# Altium PCB PCB_Recoil Motor Controller G431 DRV8350RS v1.1.pcbdoc
Units mm, origin at the board's own origin, x right, y up, seen from the top; angles counter-clockwise.
Board outline 121.4 x 97.9 mm, 2 copper layers (Top Layer, Bottom Layer); 94 components, 78 nets, 355 pads, 526 vias.
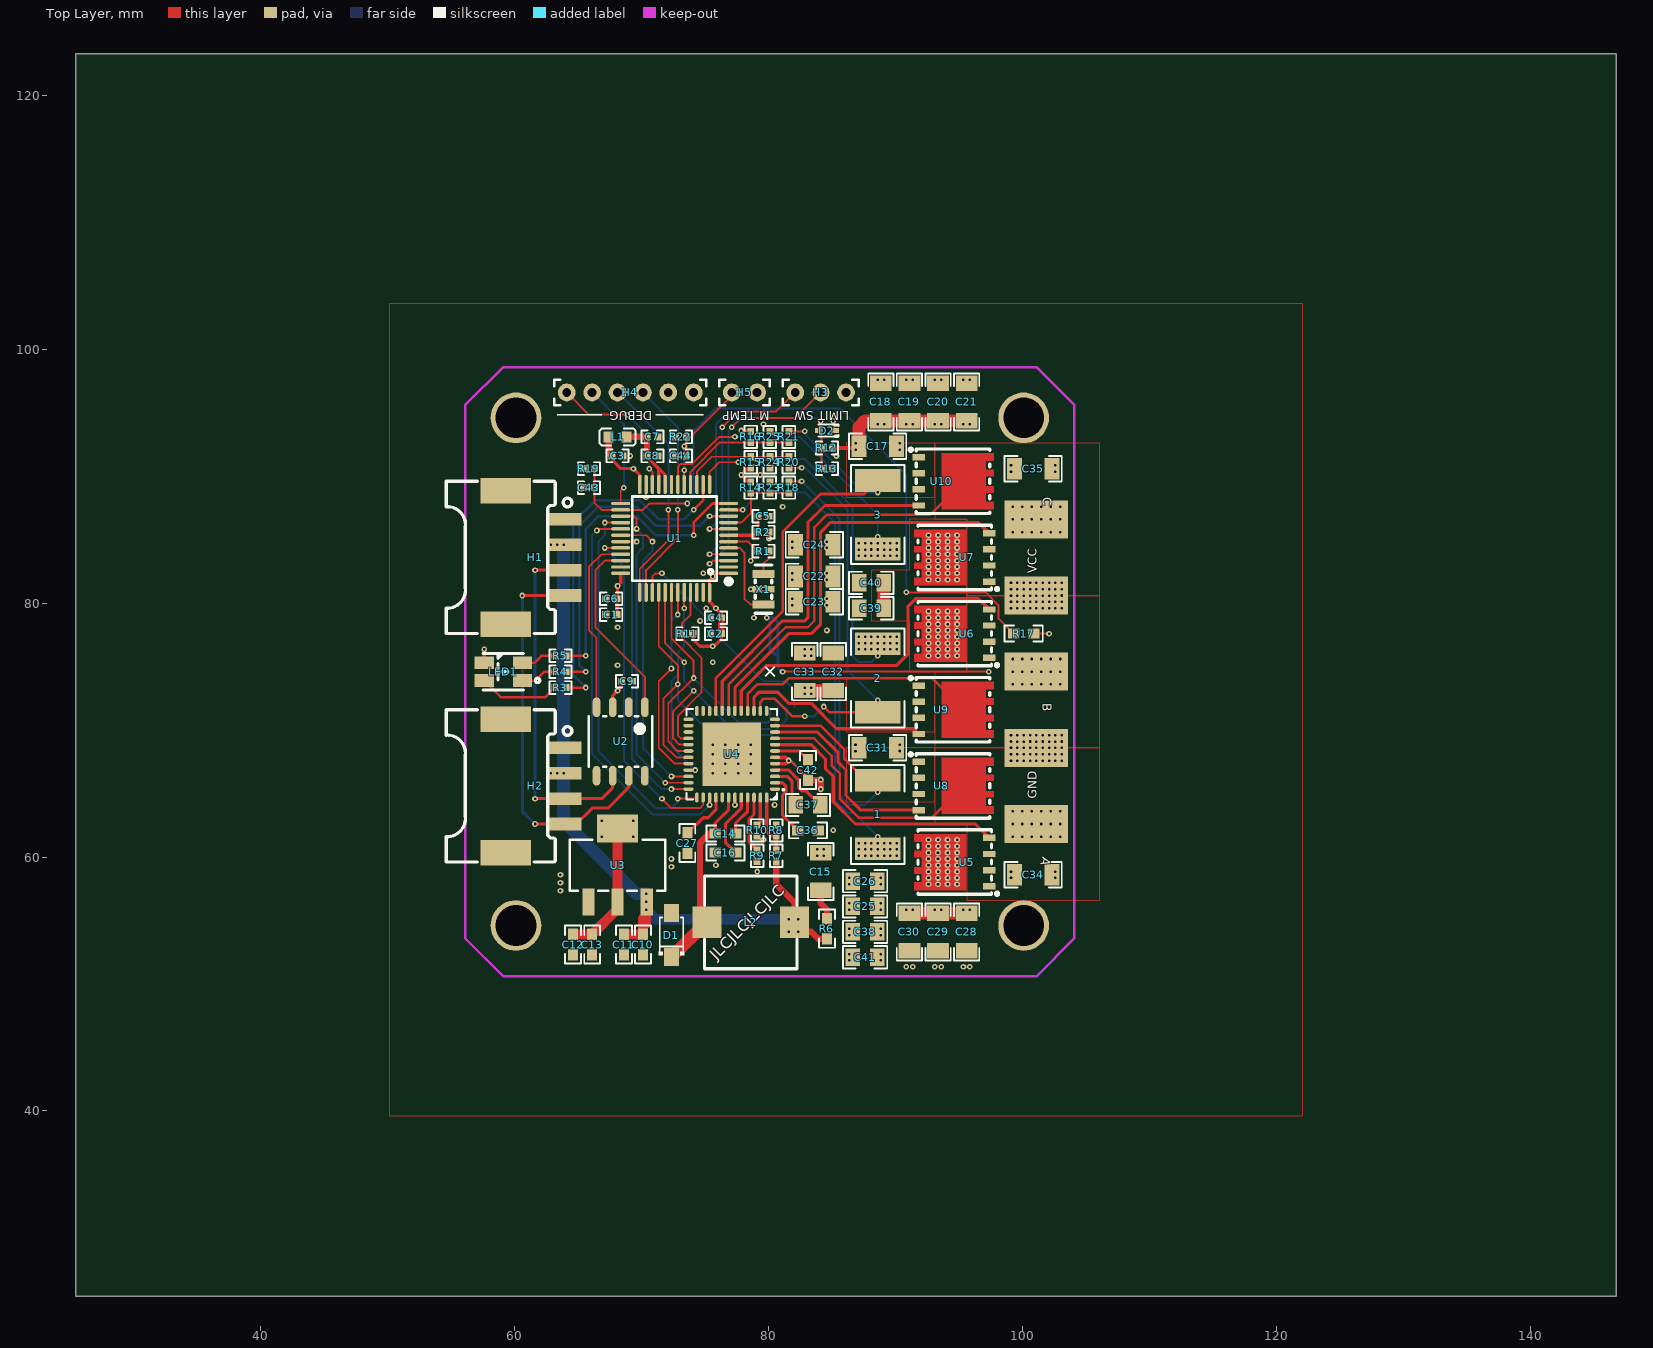
[diagram p0: Top Layer view]
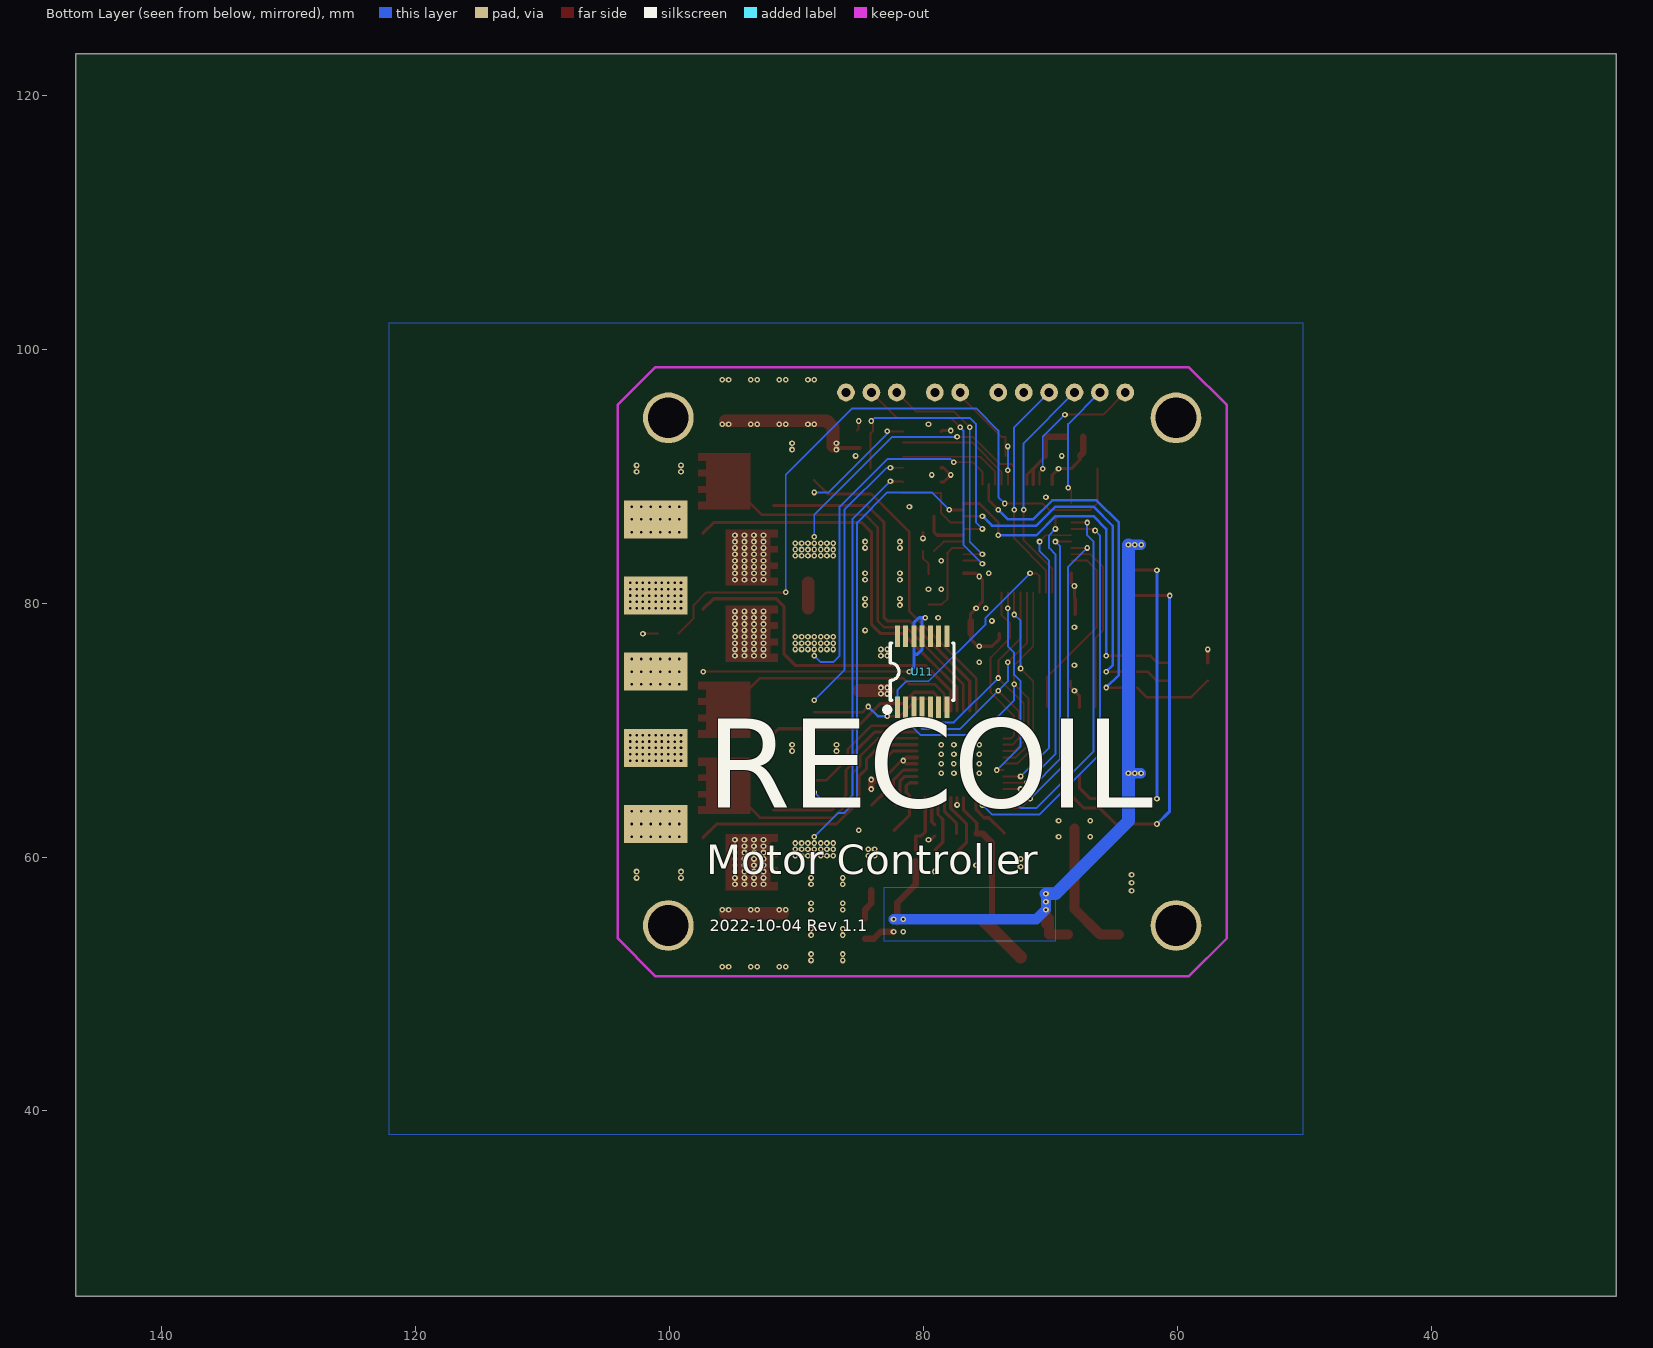
[diagram p1: Bottom Layer view, seen from below]

## Layer stack, top to bottom
Top Layer: signal copper (thickness not stored)
Dielectric: dielectric 0.32, FR-4, Dk 4.8
Bottom Layer: signal copper (thickness not stored)

## Board outline
146.8,25.4 25.4,25.4 25.4,123.3 146.8,123.3

## Components (designator, comment, footprint, x,y, rotation, side; value= is the part's Value field where it differs from the comment)
1 "3mR" RES-2512_NT 88.6,63.35 r270 top
2 "3mR" RES-2512_NT 88.6,74.1 r90 top
3 "3mR" RES-2512_NT 88.6,86.975 r270 top
C1 "1u" CAPA-0402 67.6,79.1 r0 top
C2 "1u" CAPA-0402 75.85,77.6 r0 top
C3 "100n" CAPA-0402 68.1,91.6 r180 top
C4 "100n" CAPA-0402 75.85,78.85 r0 top
C5 "100n" CAPA-0402 79.6,86.85 r180 top
C6 "100n" CAPA-0402 67.6,80.35 r0 top
C7 "1u" CAPA-0402 70.85,93.1 r180 top
C8 "10n" CAPA-0402 70.85,91.6 r180 top
C9 "100n" CAPA-0402 68.85,73.85 r180 top
C10 "1u" CAPA-0603 70.1,53.1 r90 top
C11 "10u" CAPA-0603 68.6,53.1 r90 top
C12 "10u" CAPA-0603 64.6,53.1 r90 top
C13 "1u" CAPA-0603 66.1,53.1 r90 top
C14 "10n" CAPA-0603 76.6,61.85 r180 top
C15 "47u" CAPA-1206 84.1,58.85 r270 top
C16 "470n" CAPA-0603 76.6,60.35 r0 top
C17 "10u" CAPA-1206 88.6,92.35 r180 top
C18 "10u" CAPA-1206 88.85,95.85 r270 top
C19 "10u" CAPA-1206 91.1,95.85 r270 top
C20 "10u" CAPA-1206 93.35,95.85 r270 top
C21 "10u" CAPA-1206 95.6,95.85 r270 top
C22 "10u" CAPA-1206 83.6,82.1 r180 top
C23 "10u" CAPA-1206 83.6,80.1 r180 top
C24 "10u" CAPA-1206 83.6,84.6 r180 top
C25 "100n" CAPA-0805 87.601,56.101 r0 top
C26 "1u" CAPA-0805 87.6,58.1 r0 top
C27 "1u" CAPA-0603 73.6,61.1 r270 top
C28 "10u" CAPA-1206 95.6,54.1 r90 top
C29 "10u" CAPA-1206 93.35,54.1 r90 top
C30 "10u" CAPA-1206 91.1,54.1 r90 top
C31 "10u" CAPA-1206 88.6,68.6 r0 top
C32 "10u" CAPA-1206 85.1,74.6 r270 top
C33 "10u" CAPA-1206 82.85,74.6 r270 top
C34 "10u" CAPA-1206 100.85,58.6 r180 top
C35 "10u" CAPA-1206 100.85,90.6 r180 top
C36 "1u" CAPA-0603 83.1,62.1 r180 top
C37 "47n" CAPA-0805 83.1,64.1 r180 top
C38 "1u" CAPA-0805 87.601,54.1 r0 top
C39 "1u" CAPA-0805 88.101,79.599 r0 top
C40 "1u" CAPA-0805 88.101,81.6 r0 top
C41 "100n" CAPA-0805 87.601,52.101 r0 top
C42 "1u" CAPA-0603 83.1,66.85 r270 top
C43 "1u" CAPA-0402 65.85,89.1 r0 top
C44 "1u" CAPA-0402 73.1,91.6 r0 top
D1 "DFLS1100" SOD-123FL_L2.7-W1.8-LS3.8-RD 72.35,53.85 r90 top
D2 "BAT30KFILM" SOD-523_L1.2-W0.8-LS1.6-RD-1 84.6,93.6 r180 top
H1 "HDR-SMT2.0-H-P4-R1-C4" CONN-SMD_SM04B-PASS-TBT-LF-SN 61.6,83.6 r90 top
H2 "HDR-SMT2.0-H-P4-R1-C4" CONN-SMD_SM04B-PASS-TBT-LF-SN 61.6,65.6 r90 top
H3 "HDR-TH2.0-V-P3-R1-C3" HDR-TH2.0-V-P3-R1-C3 84.1,96.6 r180 top
H4 "HDR-TH2.0-V-P6-R1-C6" HDR-TH2.0-V-P6-R1-C6 69.1,96.6 r180 top
H5 "HDR-TH2.0-V-P2-R1-C2" HDR-TH2.0-V-P2-R1-C2 78.1,96.6 r180 top
L1 "600Ω" L0603 68.1,93.1 r180 top
L2 "220uH" IND-SMD_L7.3-W7.3_GCRH73 78.6,54.85 r180 top
LED1 "TJ-S3528UG2W9TLCCYRGB-A5" LED-ARRAY-SMD_4P-L3.2-W2.7-TL-RD_TJ-S3528 59.1,74.6 r180 top
R1 "2k2" RES-0402 79.6,84.1 r180 top
R2 "100k" RES-0402 79.6,85.6 r0 top
R3 "1k" RES-0402 63.6,73.35 r180 top
R4 "1k" RES-0402 63.6,74.6 r180 top
R5 "1k" RES-0402 63.6,75.85 r180 top
R6 "1R5" RES-0603 84.6,54.35 r270 top
R7 "2k" RES-0402 80.6,60.1 r270 top
R8 "2k" RES-0402 80.6,62.1 r270 top
R9 "332k" RES-0402 79.1,60.1 r90 top
R10 "200k" RES-0402 79.1,62.1 r90 top
R11 "10k" RES-0402 73.6,77.6 r0 top
R12 "220k" RES-0402 84.6,92.225 r0 top
R13 "10k" RES-0402 84.6,90.6 r180 top
R14 "1k5" RES-0402 78.6,89.1 r90 top
R15 "1k5" RES-0402 78.6,91.1 r270 top
R16 "1k5" RES-0402 78.6,93.1 r90 top
R17 "10k" RES-0603 100.1,77.6 r180 top
R18 "1k5" RES-0402 81.601,89.101 r90 top
R19 "2k" RES-0402 65.851,90.599 r0 top
R20 "1k5" RES-0402 81.601,91.1 r270 top
R21 "1k5" RES-0402 81.601,93.099 r90 top
R22 "2k" RES-0402 73.1,93.099 r0 top
R23 "2k2" RES-0402 80.1,89.101 r270 top
R24 "2k2" RES-0402 80.1,91.1 r90 top
R25 "2k2" RES-0402 80.1,93.099 r270 top
U1 "STM32G431CBTx" LQFP-48_L7.0-W7.0-P0.50-LS9.0-BL 72.6,85.1 r90 top
U2 "SN65HVD230D" SOIC-8_L5.0-W4.0-P1.27-LS6.0-TL 68.35,69.1 r270 top
U3 "AMS1117-3.3" SOT-223_L6.5_W3.5_P2.30_BL 68.1,59.35 r0 top
U4 "DRV8350RSRGZT" VQFN-48_L7.0-W7.0-P0.50-TL-EP5.0 77.1,68.1 r180 top
U5 "STL100N10F7" POWERVDFN-8_L6.2-W5.2-P1.27-LS6.0-BL 95.6,59.6 r90 top
U6 "STL100N10F7" POWERVDFN-8_L6.2-W5.2-P1.27-LS6.0-BL 95.6,77.6 r90 top
U7 "STL100N10F7" POWERVDFN-8_L6.2-W5.2-P1.27-LS6.0-BL 95.6,83.6 r90 top
U8 "STL100N10F7" POWERVDFN-8_L6.2-W5.2-P1.27-LS6.0-BL 93.6,65.6 r270 top
U9 "STL100N10F7" POWERVDFN-8_L6.2-W5.2-P1.27-LS6.0-BL 93.6,71.6 r270 top
U10 "STL100N10F7" POWERVDFN-8_L6.2-W5.2-P1.27-LS6.0-BL 93.6,89.6 r270 top
U11 "AS5047P-ATSM" TSSOP-14_L5.0-W4.4-P0.65-LS6.4-BL 80.1,74.6 r0 bottom
X1 "8M" OSC-SMD_3P-L3.2-W1.3-P1.2-L 79.6,81.1 r90 top

## Footprints (in the part's own frame and the unit in brackets; to place one, negate y for a bottom-side part, rotate by r counter-clockwise, add the part's x,y. Pads: shape width x height; smd on the part's side, far side on the other; paste and mask are expansions set on the pad)
CAPA-0402 [mm]
  rect 0.566x0.54 smd: 1(-0.433,0) 2(0.433,0)
  silkscreen extent -0.87,-0.5 0.87,0.5
CAPA-0603 [mm]
  rect 0.9x0.8 smd: 1(-0.8,0) 2(0.8,0)
  silkscreen extent -1.5,-0.62 1.5,0.62
CAPA-0805 [mm]
  rect 1.133x1.377 smd: 1(-0.966,0) 2(0.966,0)
  silkscreen extent -1.75,-0.88 1.75,0.88
CAPA-1206 [mm]
  rect 1.208x1.701 smd: 1(-1.479,0) 2(1.479,0)
  silkscreen extent -2.25,-1 2.25,1
CONN-SMD_SM04B-PASS-TBT-LF-SN [mm]
  rect 1x2.7 smd: 1(3,-2.3) 2(1,-2.3) 3(-1,-2.3) 4(-3,-2.3)
  rect 2x4 smd: 5(-5.25,2.3) 6(5.25,2.3)
  silkscreen extent -6,-2.91 6,7
HDR-TH2.0-V-P2-R1-C2 [mm]
  round 1.4 hole 0.7: 1(-1,0) 2(1,0)
  silkscreen extent -2,-1 2,1
HDR-TH2.0-V-P3-R1-C3 [mm]
  round 1.4 hole 0.7: 1(-2,0) 2(0,0) 3(2,0)
  silkscreen extent -3,-1 3,1
HDR-TH2.0-V-P6-R1-C6 [mm]
  round 1.4 hole 0.7: 1(-5,0) 2(-3,0) 3(-1,0) 4(1,0) 5(3,0) 6(5,0)
  silkscreen extent -6,-1 6,1
IND-SMD_L7.3-W7.3_GCRH73 [mm]
  rect 2.3x2.5 smd: 1(-3.45,0) 2(3.45,0)
  silkscreen extent -3.65,-3.65 3.65,3.65
L0603 [mm]
  rect 0.8x0.864 smd: 1(-0.7,0) 2(0.7,0)
  silkscreen extent -1.42,-0.65 1.41,0.67
LED-ARRAY-SMD_4P-L3.2-W2.7-TL-RD_TJ-S3528 [mm]
  rect 1.5x1 smd: 1(-1.5,0.7) 2(-1.5,-0.7) 3(1.5,0.7) 4(1.5,-0.7)
  silkscreen extent -2.87,-1.44 1.61,1.44
LQFP-48_L7.0-W7.0-P0.50-LS9.0-BL [mm]
  oval 0.27x1.5 smd: 1(-2.75,-4.25) 2(-2.25,-4.25) 3(-1.75,-4.25) 4(-1.25,-4.25) 5(-0.75,-4.25) 6(-0.25,-4.25) 7(0.25,-4.25) 8(0.75,-4.25) 9(1.25,-4.25) 10(1.75,-4.25) 11(2.25,-4.25) 12(2.75,-4.25) 25(2.75,4.25) 26(2.25,4.25) 27(1.75,4.25) 28(1.25,4.25) 29(0.75,4.25) 30(0.25,4.25) 31(-0.25,4.25) 32(-0.75,4.25) 33(-1.25,4.25) 34(-1.75,4.25) 35(-2.25,4.25) 36(-2.75,4.25)
  oval 1.5x0.27 smd: 13(4.25,-2.75) 14(4.25,-2.25) 15(4.25,-1.75) 16(4.25,-1.25) 17(4.25,-0.75) 18(4.25,-0.25) 19(4.25,0.25) 20(4.25,0.75) 21(4.25,1.25) 22(4.25,1.75) 23(4.25,2.25) 24(4.25,2.75) 37(-4.25,2.75) 38(-4.25,2.25) 39(-4.25,1.75) 40(-4.25,1.25) 41(-4.25,0.75) 42(-4.25,0.25) 43(-4.25,-0.25) 44(-4.25,-0.75) 45(-4.25,-1.25) 46(-4.25,-1.75) 47(-4.25,-2.25) 48(-4.25,-2.75)
  silkscreen extent -3.59,-4.46 3.3,3.34
OSC-SMD_3P-L3.2-W1.3-P1.2-L [mm]
  rect 0.65x1.7 smd: 1(-1.2,0) 3(1.2,0)
  rect 0.5x1.7 smd: 2(0,0)
  silkscreen extent -1.9,-0.65 1.9,0.65
POWERVDFN-8_L6.2-W5.2-P1.27-LS6.0-BL [mm]
  rect 0.5x1 smd: 1(-1.905,-1.775) 2(-0.635,-1.775) 3(0.635,-1.775) 4(1.905,-1.775)
  round 0 smd: 5(0,1.775)
  Top Layer region: -2.2,0.025 -2.2,4.125 -1.6,4.125 -1.6,3.525 -0.9,3.525 -0.9,4.125 -0.4,4.125 -0.4,3.525 0.4,3.525 0.4,4.125 0.9,4.125 0.9,3.525 1.6,3.525 1.6,4.125 2.2,4.125 2.2,0.025
  silkscreen extent -2.61,-2.53 2.54,3.83
RES-0402 [mm]
  rect 0.566x0.54 smd: 1(-0.433,0) 2(0.433,0)
  silkscreen extent -0.87,-0.5 0.87,0.5
RES-0603 [mm]
  rect 0.9x0.8 smd: 1(-0.8,0) 2(0.8,0)
  silkscreen extent -1.5,-0.62 1.5,0.62
RES-2512_NT [mm]
  rect 1.8x3.6 smd: 1(-2.7,0) 2(2.7,0)
  rect 0.25x0.25 smd: 3(-1.8,0) 4(1.8,0)
  silkscreen extent -3.9,-2.1 3.9,2.1
SOD-123FL_L2.7-W1.8-LS3.8-RD [mm]
  rect 1.4x1.2 smd: 1(-1.735,0) 2(1.735,0)
  silkscreen extent -1.6,-1 1.38,1
SOD-523_L1.2-W0.8-LS1.6-RD-1 [mm]
  rect 0.6x0.36 smd: 1(-0.635,0) 2(0.635,0)
  silkscreen extent -0.91,-0.55 0.68,0.55
SOIC-8_L5.0-W4.0-P1.27-LS6.0-TL [mm]
  oval 1.55x0.6 smd: 1(-2.7,1.905) 2(-2.7,0.635) 3(-2.7,-0.635) 4(-2.7,-1.905) 5(2.7,-1.905) 6(2.7,-0.635) 7(2.7,0.635) 8(2.7,1.905)
  silkscreen extent -2,-2.5 2,2.5
SOT-223_L6.5_W3.5_P2.30_BL [mm]
  rect 0.95x2.15 smd: 1(-2.3,-2.9) 2(0,-2.9) 3(2.3,-2.9)
  rect 3.25x2.2 smd: 2(0,2.9)
  silkscreen extent -3.75,-2 3.75,2
TSSOP-14_L5.0-W4.4-P0.65-LS6.4-BL [mm]
  rect 0.4x1.7 smd: 1(1.95,2.8) 2(1.3,2.8) 3(0.65,2.8) 4(0,2.8) 5(-0.65,2.8) 6(-1.3,2.8) 7(-1.95,2.8) 8(-1.95,-2.8) 9(-1.3,-2.8) 10(-0.65,-2.8) 11(0,-2.8) 12(0.65,-2.8) 13(1.3,-2.8) 14(1.95,-2.8)
  silkscreen extent -2.5,-2.25 2.95,3.2
VQFN-48_L7.0-W7.0-P0.50-TL-EP5.0 [mm]
  oval 0.785x0.28 smd: 1(-3.407,2.75) 2(-3.407,2.25) 3(-3.407,1.75) 4(-3.407,1.25) 5(-3.407,0.75) 6(-3.407,0.25) 7(-3.407,-0.25) 8(-3.407,-0.75) 9(-3.407,-1.25) 10(-3.407,-1.75) 11(-3.407,-2.25) 12(-3.407,-2.75) 25(3.407,-2.75) 26(3.407,-2.25) 27(3.407,-1.75) 28(3.407,-1.25) 29(3.407,-0.75) 30(3.407,-0.25) 31(3.407,0.25) 32(3.407,0.75) 33(3.407,1.25) 34(3.407,1.75) 35(3.407,2.25) 36(3.407,2.75)
  oval 0.28x0.785 smd: 13(-2.75,-3.407) 14(-2.25,-3.407) 15(-1.75,-3.407) 16(-1.25,-3.407) 17(-0.75,-3.407) 18(-0.25,-3.407) 19(0.25,-3.407) 20(0.75,-3.407) 21(1.25,-3.407) 22(1.75,-3.407) 23(2.25,-3.407) 24(2.75,-3.407) 37(2.75,3.407) 38(2.25,3.407) 39(1.75,3.407) 40(1.25,3.407) 41(0.75,3.407) 42(0.25,3.407) 43(-0.25,3.407) 44(-0.75,3.407) 45(-1.25,3.407) 46(-1.75,3.407) 47(-2.25,3.407) 48(-2.75,3.407)
  rect 4.6x5 smd: 49(0,0)
  silkscreen extent -4.14,-3.58 3.58,3.58

## Free pads (board coordinates)
  round 4 hole 3.2: 1(60.1,54.6) 1(60.1,94.6) 1(100.1,94.6) 1(100.1,54.6)
  rect 5x3 smd far side: 1(101.1,68.599) 1(101.1,62.598) 2(101.099,74.599) 2(101.099,80.599) 3(101.1,86.599)
  rect 5x3 smd: 1(101.1,68.599) 1(101.1,62.598) 2(101.099,74.599) 2(101.099,80.599) 3(101.1,86.599)

## Via types
v1: diameter 0.45, hole 0.2, Top Layer to Bottom Layer, tented both sides, 526 vias

## Nets (pads, with @x,y where several pads share a name; then routed paths per layer and width w, separated by ;. In a path a pad name is that pad's centre, name@x,y a point inside that pad or via, vN(x,y) a via of type N, cw(c..) or ccw(c..) an arc to the next point about the centre after c; other vN are vias at no path point)
3V3: C1.2 C2.2 C3.2 C4.2 C6.2 C9.2 C12.2 C13.2 D2.1 H4.2 H5.1 L1.2 LED1.4 R2.2 R11.2 R14.2 R15.2 R16.2 R17.1 U1.1 U1.24 U1.36 U1.48 U2.3 U3.2 U11.11 U11.12 | length 70.3
  Top Layer w0.15: v1(81.1,74.6) v1(97.35,74.6) ; v1(85.1,94.35) 85.1,93.735 D2.1 ; R17.1 v1(102.1,77.6)
  Top Layer w0.25: LED1.4 v1(57.6,76.35) ; C3.2@67.667,91.6 67.667,91.283 68.35,90.599 v1(69.35,90.6) ; U2.3 67.715,72.715 v1(68.1,73.1) 68.416,73.416 C9.2@68.416,73.851 ; C1.2 C6.2 68.101,80.417 68.101,81.349 v1(68.1,81.35) 68.35,81.6 U1.36@68.35,82.35 ; v1(69.35,90.6) 69.851,90.099 U1.24 ; R11.2@74.032,77.6 74.032,77.168 74.6,76.6 v1(75.6,76.6) 75.714,76.6 76.282,77.168 C2.2@76.282,77.6 ; U1.48 75.35,81.85 v1(75.6,82.1) 75.85,82.35 U1.1 ; U1.48 75.35,80.1 v1(75.85,79.6) 76.282,79.168 C4.2@76.282,78.601 ; v1(77.85,93.6) 78.533,93.6 R16.2 ; R14.2 78.417,89.533 v1(77.85,90.1) 78.417,90.667 R15.2 ; v1(80.033,85.1) R2.2
  Top Layer w0.5: L1.2 67.4,91.867 C3.2 ; C2.2 76.283,77.917 C4.2@76.283,78.6
  Top Layer w0.8: C12.2@64.6,53.902 66.1,53.902 68.101,55.903 U3.2@68.101,56.449 ; U3.2@68.1,56.45 U3.2@68.1,62.25
  Mid-Layer 1 w0.15: v1(97.35,74.6) 100.35,77.6 v1(102.1,77.6)
  Bottom Layer w0.25: U11.12 80.75,74.95 v1(81.1,74.6) ; v1(79.85,78.85) 80.1,78.849 U11.11 80.1,76.35 80.476,75.974 80.75,75.974 U11.12 80.75,78.451 80.349,78.849 v1(79.85,78.85)
  other v1: 66.85,61.6 69.35,61.601 66.85,62.85 69.35,62.85
5V: C10.2 C11.2 H1.2 H2.2 L2.1 R6.2 R7.2 U3.3 | length 60.1
  Top Layer w0.5: R7.2 80.6,57.851 82.05,56.401 L2.1@82.05,54.85 ; v1(82.35,54.1) 83.351,54.1 83.9,53.551 R6.2
  Top Layer w0.8: C11.2@68.6,53.902 70.1,53.902 70.1,55.151 70.101,54.527 70.35,54.776 v1(70.35,57.1)
  Bottom Layer w0.8: v1@62.848,84.6 v1@63.849,84.6 ; v1(62.85,66.601) v1@63.849,66.602 ; v1(70.35,57.1) v1(70.35,55.85) 71.1,55.1 v1(82.35,55.1)
  Bottom Layer w1: v1@63.849,66.602 63.849,62.85 69.6,57.099 v1@70.349,57.099 ; v1(63.85,66.601) v1(63.849,84.599)
  other v1: 81.6,54.1 81.6,55.1 70.35,56.475 63.35,66.601 62.85,84.6 63.349,84.6
C14_1: C14.1 U4.45 | length 3.2
  Top Layer w0.25: C14.1@77.397,61.849 77.397,62.647 78.35,63.599 U4.45@78.35,64.691
C14_2: C14.2 D1.1 L2.2 U4.42 | length 15.2
  Top Layer w0.25: C14.2@75.797,61.849 75.797,62.675 76.851,63.726 U4.42@76.851,64.691
  Top Layer w0.5: L2.2@75.15,54.85 74.6,55.4 74.6,61.1 75.35,61.85 C14.2
  Top Layer w1: D1.1 75.085,54.85 L2.2@75.15,54.85
C15_2: C15.2 R6.1 | length 2.4
  Top Layer w0.5: C15.2 84.1,56.35 84.601,55.85 R6.1
C16_2: C16.2 U4.44 | length 5.2
  Top Layer w0.25: C16.2@77.401,60.35 76.6,61.151 76.6,61.6 76.6,62.601 77.849,63.851 U4.44@77.849,64.691
C27_1: C27.1 U4.40 | length 4
  Top Layer w0.25: C27.1 73.648,61.9 74.85,63.099 75.226,63.099 75.85,63.726 U4.40@75.85,64.691
C36_2: C36.2 U4.2 | length 5
  Top Layer w0.25: U4.2 81.1,65.85 81.35,65.6 81.35,65.1 81.1,64.85 81.1,63.299 C36.2@82.298,62.1
C37_1: C37.1 U4.4 | length 5.1
  Top Layer w0.25: U4.4@80.506,66.85 81.601,66.85 82.35,66.101 82.35,65.474 82.599,65.225 82.942,65.225 C37.1@84.065,64.1
C37_2: C37.2 U4.3 | length 3.5
  Top Layer w0.25: U4.3@80.506,66.35 81.474,66.35 81.85,65.974 81.85,64.384 C37.2
C42_1: C42.1 U4.7 | length 2.9
  Top Layer w0.25: U4.7 82.399,68.35 C42.1@83.1,67.649
CAN_RX: U1.33 U2.4 | length 14.2
  Top Layer w0.15: U2.4 66.445,77.254 65.851,77.849 65.851,82.85 66.851,83.851 U1.33
CAN_TX: U1.34 U2.1 | length 14.7
  Top Layer w0.15: U1.34 67.1,83.35 66.351,82.601 66.351,78.1 70.255,74.194 U2.1
CANH: H1.4 H2.4 U2.7 | length 31.2
  Top Layer w0.25: v1(60.6,80.6) H1.4 ; v1(61.6,62.6) H2.4@63.9,62.6 ; H2.4 64.85,62.601 66.099,63.851 67.352,63.851 68.985,65.484 U2.7
  Bottom Layer w0.25: v1(60.6,80.6) 60.6,63.6 v1(61.6,62.6)
CANL: H1.3 H2.3 U2.6 | length 27.7
  Top Layer w0.25: v1(61.6,64.6) 63.9,64.6 66.85,64.6 67.715,65.465 U2.6@67.715,66.4 ; v1(61.6,82.6) H1.3@63.9,82.6
  Bottom Layer w0.25: v1(61.6,64.6) v1(61.6,82.6)
ENABLE: U1.44 U4.33 | length 15.7
  Top Layer w0.15: v1(73.35,79.6) U1.44 ; U4.33 v1(74.225,66.85)
  Bottom Layer w0.15: v1(73.35,79.6) 73.351,76.599 72.851,76.101 72.851,74.351 72.35,73.85 72.35,68.725 v1(74.225,66.85)
FETTEMP_SENSE: C43.2 R17.2 R19.2 U1.26 | length 55.7
  Top Layer w0.15: R19.2 C43.2 66.283,87.917 66.85,87.35 U1.26@68.35,87.35 ; U1.26 70.1,87.351 70.599,87.85 v1(73.6,87.85) ; v1(90.85,80.85) 97.1,80.85 98.1,79.85 98.1,78.8 R17.2
  Bottom Layer w0.15: v1(73.6,87.85) 74.1,88.35 74.1,93.599 75.85,95.349 85.599,95.349 90.849,90.099 v1@90.849,80.851
GHA: U4.8 U5.4 | length 21.5
  Top Layer w0.25: U4.8@80.506,68.849 83.351,68.849 84.474,67.724 84.474,66.975 85.101,66.35 85.101,64.351 86.849,62.601 96.28,62.601 U5.4@97.374,61.506
GHB: U4.17 U6.4 | length 26.7
  Top Layer w0.25: U4.17@77.849,71.506 77.849,73.099 79.851,75.1 90.1,75.1 90.974,75.974 90.974,79.726 91.601,80.351 96.531,80.351 U6.4@97.374,79.505
GHC: U4.18 U7.4 | length 31.9
  Top Layer w0.25: U4.18@77.349,71.506 77.349,73.35 81.601,77.6 83.351,77.6 84.1,78.349 84.1,85.601 84.85,86.35 96.531,86.35 U7.4@97.374,85.504
GLA: U4.10 U8.4 | length 15.5
  Top Layer w0.25: U4.10@80.506,69.85 83.849,69.85 85.475,68.225 85.475,67.475 86.099,66.85 86.099,64.849 87.255,63.696 U8.4@91.825,63.696
GLB: U4.15 U9.4 | length 15.6
  Top Layer w0.25: U4.15@78.85,71.506 78.85,72.601 79.226,72.974 80.725,72.974 81.601,72.101 83.351,72.101 85.35,70.099 91.421,70.099 U9.4@91.825,69.695
GLC: U4.20 U10.4 | length 27.9
  Top Layer w0.25: U4.20@76.351,71.506 76.351,73.851 81.101,78.601 82.851,78.601 83.1,78.849 83.1,86.35 84.446,87.694 U10.4@91.825,87.694
GND: 1.2 2.2 3.2 C1.1 C2.1 C3.1 C4.1 C5.1 C6.1 C7.1 C8.1 C9.1 C10.1 C11.1 C12.1 C13.1 C15.1 C16.1 C17.1 C18.1 C19.1 C20.1 C21.1 C22.1 C23.1 C24.1 C25.1 C26.1 C27.2 C28.1 C29.1 C30.1 C31.1 C32.1 C33.1 C34.1 C35.1 C36.1 C38.1 C39.1 C40.1 C41.1 C43.1 C44.1 D1.2 H1.1 H1.5 H1.6 H2.1 H2.5 H2.6 H3.1 H4.1 pad.1@60.1,54.6 pad.1@60.1,94.6 pad.1@100.1,54.6 pad.1@100.1,94.6 pad.1@101.1,68.599 R8.1 R9.1 R13.1 R19.1 R22.1 R23.1 R24.1 R25.1 U1.19 U1.23 U1.35 U1.47 U2.2 U2.8 U3.1 U4.1 U4.27 U4.41 U4.49 U11.5 U11.13 X1.2
  other v1: 90.85,51.35 91.35,51.35 93.1,51.35 93.6,51.35 95.35,51.35 95.85,51.35 86.35,51.85 86.35,52.35 86.35,53.85 86.35,54.35 86.35,55.85 86.35,56.35 63.6,57.35 86.35,57.85 63.6,57.975 86.35,58.35 102.599,58.35 63.6,58.6 79.099,58.85 102.599,58.849 72.349,59.225 75.849,59.35 72.349,59.85 83.85,60.1 84.35,60.1 87.1,60.1 87.6,60.1 88.099,60.101 88.6,60.101 89.1,60.1 89.6,60.1 90.099,60.101 83.85,60.6 84.35,60.6 87.1,60.6 87.6,60.6 88.099,60.601 88.599,60.601 89.1,60.6 89.6,60.6 90.099,60.601 87.1,61.1 87.6,61.1 88.099,61.101 88.599,61.101 89.1,61.1 89.6,61.1 90.099,61.101 85.1,62.1 80.475,64.101 75.6,66.6 76.599,66.6 77.599,66.6 78.6,66.6 75.6,67.35 76.6,67.35 77.6,67.35 78.6,67.351 99.1,67.601 99.6,67.598 100.1,67.598 100.6,67.6 101.1,67.598 101.6,67.6 102.1,67.598 102.6,67.598 103.1,67.6 75.6,68.1 76.599,68.1 77.599,68.1 78.6,68.1 99.1,68.1 99.6,68.098 100.1,68.098 100.6,68.1 101.1,68.098 101.6,68.1 102.1,68.098 102.6,68.098 103.1,68.1 86.85,68.349 99.1,68.601 99.6,68.598 100.1,68.598 100.6,68.6 101.1,68.598 101.6,68.6 102.1,68.598 102.6,68.598 103.1,68.601 75.6,68.85 76.599,68.85 77.599,68.85 78.6,68.85 86.85,68.849 99.1,69.1 99.6,69.098 100.1,69.098 100.6,69.1 101.1,69.098 101.6,69.1 102.1,69.098 102.6,69.098 103.1,69.1 99.1,69.601 99.6,69.598 100.1,69.598 100.6,69.6 101.1,69.598 101.6,69.6 102.1,69.598 102.6,69.598 103.1,69.6 68.1,75.1 75.6,75.35 82.85,75.85 83.35,75.85 82.85,76.35 83.35,76.35 87.1,76.351 87.6,76.351 88.099,76.352 88.599,76.352 89.1,76.351 89.6,76.351 90.099,76.352 87.1,76.851 87.6,76.851 88.099,76.852 88.599,76.852 89.1,76.851 89.6,76.851 90.099,76.852 87.1,77.351 87.6,77.351 88.099,77.352 88.599,77.352 89.1,77.351 89.6,77.351 90.099,77.352 84.6,77.85 68.1,78.1 74.6,78.6 78.85,78.85 75.1,79.6 84.599,79.85 84.599,80.35 78.6,81.1 79.6,81.1 84.599,81.85 74.85,82.35 84.599,82.35 78.6,83.35 87.1,83.725 87.6,83.725 88.099,83.726 88.6,83.726 89.1,83.725 89.6,83.725 90.099,83.726 87.1,84.225 87.6,84.225 88.099,84.226 88.599,84.226 89.1,84.225 89.6,84.225 90.099,84.226 84.599,84.35 87.1,84.725 87.6,84.725 88.099,84.726 88.599,84.726 89.1,84.725 89.6,84.725 90.099,84.726 84.599,84.85 81.1,87.6 70.35,88.35 79.35,90.1 102.599,90.35 102.599,90.849 69.1,91.6 85.35,91.6 90.35,92.101 90.35,92.601 79.6,94.1 88.601,97.6 89.1,97.6 90.85,97.6 91.35,97.6 93.101,97.6 93.601,97.6 95.351,97.6 95.85,97.6
L1_1: C7.2 C8.2 L1.1 U1.20 U1.21 | length 8.6
  Top Layer w0.25: U1.21@71.35,89.35 71.35,90.599 C8.2@70.417,91.532 ; U1.20 71.85,90.099 C8.2@70.417,91.532 ; C8.2@70.417,91.532 C8.2 C8.2@70.417,91.532
  Top Layer w0.5: L1.1 70.417,93.1 C8.2
LED1_1: LED1.1 R4.2 | length 2.9
  Top Layer w0.2: LED1.1 61.649,73.899 62.35,74.6 R4.2
LED1_2: LED1.2 R5.2 | length 2.8
  Top Layer w0.2: LED1.2 61.55,75.301 62.099,75.85 R5.2
LED1_3: LED1.3 R3.2 | length 6.4
  Top Layer w0.2: LED1.3 58.9,72.6 62.417,72.6 R3.2
LED_B: R5.1 U1.12 | length 25.5
  Top Layer w0.2: R5.1 v1(65.6,75.85) ; v1(74.1,85.35) 74.1,86.35 75.599,87.851 U1.12
  Bottom Layer w0.2: v1@65.599,75.85 65.599,85.85 66.6,86.85 69.6,86.85 71.101,85.349 v1(74.1,85.35)
LED_G: R4.1 U1.10 | length 26.6
  Top Layer w0.2: R4.1 v1(65.6,74.6) ; v1(75.35,86.85) U1.10
  Bottom Layer w0.2: v1@65.599,74.6 65.101,75.1 65.101,86.099 66.6,87.6 69.6,87.6 71.098,86.101 74.601,86.101 v1(75.35,86.85)
LED_R: R3.1 U1.14 | length 28.4
  Top Layer w0.2: R3.1 v1(65.6,73.35) ; v1(74.1,87.35) 74.85,88.1 U1.14@74.85,89.35
  Bottom Layer w0.2: v1(65.6,73.35) 64.6,74.35 64.6,86.35 66.35,88.1 69.85,88.1 71.35,86.6 73.35,86.6 v1(74.1,87.35)
LIMITSW_H: H3.3 U1.4 | length 18.8
  Top Layer w0.15: v1(75.35,83.85) U1.4 ; v1(76.35,93.85) 77.601,95.1 80.6,95.1 H3.3@82.099,96.599
  Bottom Layer w0.15: v1(75.35,83.85) 76.35,84.85 v1(76.35,93.85)
LIMITSW_L: H3.2 U1.3 | length 21.2
  Top Layer w0.15: v1@75.35,83.1 75.6,83.35 U1.3 ; v1(77.1,93.85) 77.849,94.6 82.099,94.6 H3.2
  Bottom Layer w0.15: v1@75.35,83.1 76.85,84.6 76.85,93.6 v1(77.1,93.85)
  other v1: 75.35,83.1
MISO: U1.41 U4.29 U11.3 | length 23.7
  Top Layer w0.15: U1.41 71.85,76.85 v1(73.35,75.35) ; U4.29@73.691,68.849 72.975,68.849 72.475,69.35 72.475,71.476 v1(74.1,73.1)
  Bottom Layer w0.15: v1(73.35,75.35) 73.35,73.85 v1(74.1,73.1) 77.101,70.099 80.1,70.099 80.75,70.749 U11.3
MOSI: U1.42 U4.30 U11.4 | length 23.8
  Top Layer w0.15: U1.42 72.35,77.225 74.1,75.475 v1(74.1,74.1) ; U4.30@73.691,68.349 72.851,68.349 72.099,69.101 72.099,72.098 v1(74.1,74.1)
  Bottom Layer w0.15: v1(74.1,74.1) 77.6,70.6 79.975,70.6 80.1,70.724 U11.4
MOTORTEMP_SENSE: C44.2 H5.2 R22.2 U1.17 | length 10.5
  Top Layer w0.15: U1.17 v1(73.35,90.475) ; v1(73.35,92.35) 73.533,92.533 R22.2 C44.2 ; R22.2 73.849,93.099 77.1,96.35 H5.2
  Bottom Layer w0.15: v1(73.35,90.475) v1(73.35,92.35)
NFAULT: R11.1 U1.45 U4.28 | length 13.9
  Top Layer w0.15: R11.1 73.167,78.417 73.85,79.1 U1.45 ; R11.1 73.168,77.282 74.715,75.718 74.715,72.964 72.851,71.1 72.851,69.599 73.1,69.35 U4.28@73.691,69.35
NSS1: U1.39 U11.1 | length 18
  Top Layer w0.15: U1.39 70.85,82.1 71.1,82.35 v1(71.6,82.35)
  Bottom Layer w0.15: v1(71.6,82.35) 75.1,78.85 75.1,78.35 79.6,73.85 81.35,73.85 82.05,73.15 U11.1
NSS2: U1.43 U4.32 | length 15.7
  Top Layer w0.15: v1(72.35,74.85) 71.35,73.851 71.35,68.601 72.599,67.351 U4.32@73.691,67.351 ; v1(72.85,79.1) U1.43
  Bottom Layer w0.15: v1(72.35,74.85) 72.35,78.6 v1(72.85,79.1)
OPAMPA+: R14.1 R18.1 R23.2 U1.9 | length 6.6
  Top Layer w0.15: U1.9 77.85,86.35 78.6,87.1 R14.1 R18.1@81.6,88.667
OPAMPA-: 1.4 U1.11 | length 36.4
  Top Layer w0.25: U1.11 v1(77.975,87.35)
  Bottom Layer w0.15: v1@77.974,87.351 79.348,88.725 82.851,88.725 85.226,86.35 85.226,64.476 86.224,63.475 86.724,63.475 v1(88.6,61.6)
OPAMPB+: R15.1 R20.1 R24.2 U1.15 | length 8.7
  Top Layer w0.15: U1.15@74.349,89.35 74.349,90.351 75.533,91.534 R15.1@78.599,91.534 ; R15.1 R20.1@81.6,91.533
OPAMPB-: 2.4 U1.13 | length 28.4
  Top Layer w0.15: U1.13 75.35,90.351 76.099,91.1 v1(77.6,91.1)
  Bottom Layer w0.15: v1(77.6,91.1) 77.849,91.349 82.851,91.349 86.6,87.6 86.6,75.85 87.1,75.349 88.101,75.349 v1@88.599,75.85
  other v1: 88.6,75.85
OPAMPC+: R16.1 R21.1 R25.2 U1.16 | length 9.7
  Top Layer w0.15: U1.16@73.849,89.35 73.849,90.351 76.168,92.667 R16.1@78.599,92.667 ; R16.1 R21.1
OPAMPC-: 3.4 U1.18 | length 22.4
  Top Layer w0.15: U1.18 72.851,90.724 73.1,90.975 73.976,90.975 76.099,93.099 v1@77.349,93.099
  Bottom Layer w0.15: v1@77.349,93.099 82.475,93.099 88.601,86.975 v1(88.6,85.225)
  other v1: 77.35,93.1
OUTA: pad.1@101.1,62.598 U4.9 U5.1 U5.2 U5.3 U8.5 | length 20.1
  Top Layer w0.2: U4.9@80.506,69.35 83.6,69.35 84.974,67.976 84.974,67.224 85.599,66.599 85.599,64.6 87.1,63.099 92.876,63.099 U8.5
  other v1: 99.225,61.6 99.975,61.601 100.725,61.601 101.475,61.601 102.225,61.601 102.975,61.601 99.225,62.6 99.975,62.601 100.725,62.6 101.475,62.6 102.225,62.601 102.975,62.6 99.225,63.599 99.975,63.6 100.725,63.6 101.475,63.6 102.225,63.601 102.975,63.6
OUTB: pad.2@101.099,74.599 U4.16 U6.1 U6.2 U6.3 U9.5 | length 19.9
  Top Layer w0.2: U4.16@78.35,71.506 78.35,72.85 79.099,73.599 81.101,73.599 81.601,74.1 92.876,74.1 U9.5
  other v1: 99.225,73.6 99.975,73.6 100.725,73.6 101.475,73.6 102.225,73.6 102.975,73.6 99.225,74.599 99.975,74.599 100.725,74.599 101.475,74.599 102.225,74.599 102.975,74.599 99.225,75.6 99.975,75.6 100.725,75.6 101.475,75.6 102.225,75.6 102.975,75.6
OUTC: pad.3 U4.19 U7.1 U7.2 U7.3 U10.5 | length 31.6
  Top Layer w0.2: U4.19@76.851,71.506 76.851,73.599 81.35,78.1 83.1,78.1 83.6,78.601 83.6,85.974 84.601,86.975 92.752,86.975 95.375,89.599
  other v1: 99.225,85.6 99.975,85.599 100.725,85.599 101.475,85.599 102.225,85.599 102.975,85.599 99.225,86.599 99.975,86.599 100.725,86.599 101.475,86.599 102.225,86.599 102.975,86.599 99.225,87.6 99.975,87.599 100.725,87.6 101.475,87.6 102.225,87.6 102.975,87.6
PWMA_HI: U1.30 U4.34 | length 23.8
  Top Layer w0.15: U1.30@68.35,85.35 70.35,85.35 v1(70.85,84.85) ; v1(72.35,66.35) U4.34
  Bottom Layer w0.15: v1(70.85,84.85) 70.85,84.1 70.1,83.35 70.1,68.6 v1(72.35,66.35)
PWMA_LO: U1.27 U4.35 | length 25.3
  Top Layer w0.15: U1.27 69.351,86.85 69.6,86.599 v1@69.6,85.85 ; v1(71.85,65.85) U4.35
  Bottom Layer w0.15: v1@69.6,85.85 70.1,85.349 70.1,84.351 69.6,83.851 69.6,68.1 v1(71.85,65.85)
  other v1: 69.6,85.85
PWMB_HI: U1.31 U4.36 | length 24
  Top Layer w0.15: U1.31@68.35,84.85 v1(69.6,84.85) ; v1(72.35,65.35) U4.36
  Bottom Layer w0.15: v1@69.6,84.849 69.226,84.476 69.226,67.724 71.601,65.349 v1(72.35,65.35)
PWMB_LO: U1.28 U4.37 | length 29.6
  Top Layer w0.15: v1(67.1,86.35) U1.28 ; v1(72.85,64.6) 74.257,64.6 U4.37@74.35,64.692
  Bottom Layer w0.15: v1(67.1,86.35) 67.1,85.349 66.6,84.849 66.6,68.349 71.101,63.851 72.35,63.851 72.851,64.351 v1(72.85,64.6)
PWMC_HI: U1.32 U4.38 | length 27.1
  Top Layer w0.15: v1(67.1,84.35) U1.32 ; v1(71.6,64.6) 72.35,63.851 74.601,63.851 74.85,64.1 U4.38@74.85,64.691
  Bottom Layer w0.15: v1(67.1,84.35) 68.599,82.851 68.599,67.601 v1(71.6,64.6)
PWMC_LO: U1.29 U4.39 | length 31.8
  Top Layer w0.15: v1(66.475,85.725) 66.6,85.85 U1.29@68.35,85.85
  Top Layer w0.25: v1(75.35,64.1) U4.39@75.35,64.692
  Bottom Layer w0.15: v1(66.475,85.725) 66.099,85.35 66.099,68.101 70.85,63.35 74.601,63.35 v1(75.35,64.1)
R7_1: R7.1 R8.2 U4.48 | length 4.7
  Top Layer w0.25: U4.48@79.851,64.691 79.851,61.974 80.158,61.666 R8.2 ; R7.1 R8.2
R9_2: R9.2 U4.46 | length 4.6
  Top Layer w0.25: U4.46@78.85,64.691 78.85,63.35 78.474,62.974 78.474,61.158 R9.2@79.099,60.533
R10_2: R10.2 U4.47 | length 2.3
  Top Layer w0.25: R10.2 79.35,62.783 U4.47@79.35,64.692
S$42965: 
S$100341: 
S$100345: 
S$100481: 
SCLK: U1.40 U4.31 U11.2 | length 27.9
  Top Layer w0.15: U1.40 71.35,76.6 72.85,75.1 v1(72.85,73.6) ; v1(72.85,73.6) 71.718,72.474 71.718,68.857 72.724,67.851 U4.31@73.691,67.851
  Bottom Layer w0.15: v1(72.85,73.6) 72.851,72.35 75.599,69.599 80.224,69.599 81.4,70.775 U11.2
SHUNTA+: 1.1 U4.11 U8.1 U8.2 U8.3 | length 10.3
  Top Layer w0.2: U4.11@80.506,70.351 84.1,70.351 85.975,68.476 85.975,67.724 87.649,66.05 1.1
SHUNTB+: 2.1 U4.14 U9.1 U9.2 U9.3 | length 11.1
  Top Layer w0.2: U4.14@79.351,71.506 79.351,72.225 79.6,72.474 80.476,72.474 81.85,71.1 v1(82.85,71.1) ; v1(84.35,71.85) 84.8,71.4 2.1
  Bottom Layer w0.2: v1(82.85,71.1) 83.6,71.1 v1(84.35,71.85)
SHUNTC+: 3.1 U4.21 U10.1 U10.2 U10.3 | length 25.5
  Top Layer w0.2: U4.21@75.85,71.506 75.85,74.1 81.101,79.35 81.101,85.601 84.1,88.6 87.527,88.6 3.1
SWCLK: H4.3 U1.38 | length 17.9
  Top Layer w0.15: U1.38 70.35,82.6 72.85,85.1 v1(72.85,87.35)
  Bottom Layer w0.15: H4.3 72.85,93.85 v1(72.85,87.35)
SWDIO: H4.4 U1.37 | length 18.3
  Top Layer w0.15: U1.37 69.85,82.725 72.1,84.975 v1(72.1,87.35)
  Bottom Layer w0.15: H4.4 72.1,92.6 v1(72.1,87.35)
U1_5: U1.5 X1.1 | length 6.7
  Top Layer w0.15: U1.5 77.725,84.351 78.101,83.975 78.101,80.351 78.551,79.901 X1.1@79.6,79.901
U1_6: R1.2 U1.6 | length 2.6
  Top Layer w0.15: U1.6@76.85,84.85 78.417,84.85 R1.2
U1_7: C5.2 R2.1 U1.7 | length 3.7
  Top Layer w0.25: U1.7 78.917,85.35 R2.1 ; 79.167,86.043 C5.2 ; R2.1 79.168,86.043
UART_RX: H4.5 U1.25 | length 9.9
  Top Layer w0.15: U1.25@68.35,87.85 68.35,88.85 v1(68.6,89.1)
  Bottom Layer w0.15: H4.5 68.6,94.1 v1(68.6,89.1)
UART_TX: H4.6 U1.22 | length 11.8
  Top Layer w0.15: H4.6 65.85,94.85 v1(68.85,94.85) ; v1(70.6,90.6) 70.85,90.35 U1.22
  Bottom Layer w0.15: v1(68.85,94.85) 70.6,93.1 v1(70.6,90.6)
V_SHUNT_A+: 1.3 R18.2 | length 30.7
  Top Layer w0.15: R18.2 81.667,89.6 v1(82.6,89.6)
  Bottom Layer w0.15: v1@82.599,89.599 85.599,86.599 85.599,64.851 86.351,64.1 87.601,64.1 v1(88.6,65.1)
V_SHUNT_B+: 2.3 R20.2 | length 22
  Top Layer w0.15: R20.2 v1(82.6,90.667)
  Bottom Layer w0.15: v1@82.599,90.668 82.907,90.668 86.224,87.351 86.224,74.724 v1@88.599,72.35
  other v1: 88.6,72.35
V_SHUNT_C+: 3.3 R21.2 | length 9.1
  Top Layer w0.15: R21.2@81.6,93.533 v1(82.85,93.533)
  Bottom Layer w0.15: v1(82.85,93.533) 82.851,93.35 87.476,88.725 v1(88.6,88.725)
VBUS_SENSE: D2.2 R12.1 R13.2 U1.8 | length 22.4
  Top Layer w0.15: v1(75.35,85.85) U1.8 ; v1(84.1,94.35) 83.965,94.215 D2.2 84.167,93.398 R12.1 R13.2
  Bottom Layer w0.15: v1(75.35,85.85) 75.85,86.35 75.85,94.1 76.35,94.6 83.85,94.6 v1(84.1,94.35)
VCC: C17.2 C18.2 C19.2 C20.2 C21.2 C22.2 C23.2 C24.2 C25.2 C26.2 C28.2 C29.2 C30.2 C31.2 C32.2 C33.2 C34.2 C35.2 C38.2 C39.2 C40.2 C41.2 C42.2 pad.2@101.099,80.599 R10.1 R12.2 U4.5 U4.6 U4.43 U5.5 U6.5 U7.5 | length 28.7
  Top Layer w0.25: v1(77.35,64.1) U4.43@77.35,64.692 ; R10.1 79.417,61.35 v1(79.6,61.35) ; U4.5 81.35,67.35 v1(81.6,67.6) ; v1(81.6,67.6) 81.726,67.6 83.1,66.226 C42.2@83.1,66.048
  Top Layer w0.3: U4.6 81.35,67.85 v1(81.6,67.6) ; R12.2 86.996,92.225 C17.2
  Top Layer w0.5: C42.2@83.1,66.048 84.048,66.048 v1(84.1,66.1) ; v1(84.1,65.35) v1(84.1,66.1)
  Top Layer w1: C33.2 C32.2 ; C17.2@87.12,92.35 87.12,93.871 87.621,94.371 C18.2 C21.2 ; C39.2@89.066,79.6 C40.2@89.066,81.6 ; C30.2 C28.2
  other v1: 88.85,51.85 88.85,52.35 88.85,53.85 88.85,54.35 88.85,55.85 90.849,55.85 91.349,55.85 93.1,55.85 93.6,55.85 95.35,55.85 95.85,55.85 88.85,56.35 88.85,57.85 92.6,57.85 93.35,57.85 94.1,57.85 94.85,57.85 88.85,58.35 92.6,58.35 93.35,58.35 94.1,58.35 94.85,58.35 99.099,58.35 92.6,58.85 93.35,58.85 94.1,58.85 94.85,58.85 99.099,58.85 92.6,59.35 93.35,59.35 94.1,59.35 94.85,59.35 92.6,59.85 93.35,59.85 94.1,59.85 94.85,59.85 92.6,60.35 93.35,60.35 94.1,60.35 94.85,60.35 92.6,60.85 93.35,60.85 94.1,60.85 94.85,60.85 92.6,61.35 93.35,61.35 94.1,61.35 94.85,61.35 90.35,68.351 90.35,68.851 82.85,72.85 83.349,72.852 82.85,73.35 83.35,73.35 92.6,75.85 93.35,75.85 94.1,75.85 94.85,75.85 92.6,76.35 93.35,76.35 94.1,76.35 94.85,76.35 92.6,76.85 93.35,76.85 94.1,76.85 94.85,76.85 92.6,77.35 93.35,77.35 94.1,77.35 94.85,77.35 92.6,77.85 93.35,77.85 94.1,77.85 94.85,77.85 92.6,78.35 93.35,78.35 94.1,78.35 94.85,78.35 92.6,78.85 93.35,78.85 94.1,78.85 94.85,78.85 92.6,79.35 93.35,79.35 94.1,79.35 94.85,79.35 99.1,79.599 99.599,79.598 100.1,79.6 100.6,79.6 101.1,79.6 101.599,79.598 102.1,79.598 102.599,79.598 103.1,79.6 81.849,79.85 99.1,80.1 99.599,80.099 100.1,80.1 100.6,80.1 101.1,80.1 101.599,80.099 102.1,80.099 102.599,80.099 103.1,80.101 81.849,80.35 99.1,80.6 99.599,80.599 100.1,80.6 100.6,80.6 101.1,80.6 101.599,80.599 102.1,80.599 102.599,80.599 103.1,80.601 99.1,81.1 99.599,81.099 100.1,81.1 100.6,81.1 101.1,81.1 101.599,81.099 102.1,81.099 102.599,81.099 103.1,81.101 99.1,81.599 99.599,81.598 100.1,81.6 100.6,81.6 101.1,81.6 101.599,81.598 102.1,81.598 102.599,81.598 103.1,81.6 81.849,81.85 92.6,81.85 93.35,81.85 94.1,81.85 94.85,81.85 81.849,82.35 92.6,82.35 93.35,82.35 94.1,82.35 94.85,82.35 92.6,82.85 93.349,82.85 94.099,82.85 94.849,82.85 92.6,83.35 93.349,83.35 94.099,83.35 94.849,83.35 92.6,83.85 93.349,83.85 94.099,83.85 94.849,83.85 81.849,84.35 92.6,84.35 93.349,84.35 94.099,84.35 94.849,84.35 81.849,84.85 92.6,84.85 93.35,84.85 94.1,84.85 94.85,84.85 92.6,85.35 93.35,85.35 94.1,85.35 94.85,85.35 99.099,90.35 99.099,90.85 86.85,92.101 86.85,92.6 88.601,94.1 89.101,94.1 90.851,94.1 91.351,94.1 93.101,94.1 93.601,94.1 95.351,94.1 95.851,94.1
X1_3: R1.1 X1.3 | length 2
  Top Layer w0.15: X1.3@79.6,82.299 79.6,83.101 80.034,83.533 R1.1
pads on no net: U1.2 U1.46 U2.5 U4.12 U4.13 U4.22 U4.23 U4.24 U4.25 U4.26 U11.6 U11.7 U11.8 U11.9 U11.10 U11.14
copper on no net: | length 0

## Polygon pours and split planes (outlines as drawn)
5V on Bottom Layer (solid): 69.6,57.6 69.6,53.35 83.1,53.35 83.1,57.6
GND on Bottom Layer (solid): 50.1,102.1 50.1,38.1 122.1,38.1 122.1,102.1
VCC on Mid-Layer 2 (solid): 86.1,102.6 86.1,77.1 82.6,77.1 82.6,87.6 80.6,87.6 80.6,73.35 77.1,70.1 77.1,61.35 86.1,61.35 86.1,48.6 114.1,48.6 114.1,102.6
3V3 on Mid-Layer 2 (solid): 38.1,102.6 38.1,38.6 86.1,38.6 86.1,102.6
GND on Mid-Layer 1 (solid): 50.1,103.1 50.1,39.1 134.1,39.1 134.1,103.1
OUTA on Top Layer (solid): 93.1,68.6 93.1,62.6 95.6,62.6 95.6,56.6 106.1,56.6 106.1,68.6
OUTB on Top Layer (solid): 95.6,80.6 95.6,74.6 93.1,74.6 93.1,68.6 106.1,68.6 106.1,80.6
OUTC on Top Layer (solid): 93.1,92.6 93.1,86.6 95.6,86.6 95.6,80.6 106.1,80.6 106.1,92.6
VCC on Top Layer (solid): 91.1,86.6 91.1,82.6 88.1,82.6 88.1,78.6 91.1,78.6 91.1,74.6 95.6,74.6 95.6,86.6
SHUNTC+ on Top Layer (solid): 86.1,92.6 86.1,88.35 93.1,88.35 93.1,92.6
SHUNTB+ on Top Layer (solid): 86.1,74.1 86.1,69.85 93.1,69.85 93.1,74.1
SHUNTA+ on Top Layer (solid): 86.1,68.6 86.1,64.35 93.1,64.35 93.1,68.6
GND on Top Layer (solid): 50.1,103.6 50.1,39.6 122.1,39.6 122.1,103.6

## Silkscreen, mask and mechanical layers (free items; w line width, h text height)
Top Overlay:
  lines w0.1 net S$100341: 71.1,94.85 74.85,94.85
  lines w0.1 net S$100345: 63.35,94.85 66.85,94.85
  lines w0.1 net S$100481: 79.725,74.225 80.474,74.974 ; 80.475,74.225 79.726,74.974 ; 79.726,74.974 79.726,74.974 ; 80.474,74.974 80.474,74.974
  text "DEBUG" at 70.85,95.35 h1.2 r180
  text "M TEMP" at 80.1,95.35 h1.2 r180
  text "LIMIT SW" at 86.35,95.35 h1.2 r180
  text "C" at 101.35,88.35 h1.2 r270
  text "VCC" at 101.35,82.35 h1.2 r90
  text "B" at 101.35,72.099 h1.2 r270
  text "GND" at 101.35,64.6 h1.2 r90
  text "A" at 101.35,60.1 h1.2 r255
  text "JLCJLCJLCJLC" at 76.1,51.6 h1.6 r45
Bottom Overlay:
  text "RECOIL" at 97.1,61.6 h12
  text "Motor Controller" at 97.1,57.85 h4
  text "2022-10-04 Rev 1.1" at 96.85,53.85 h1.6
Document:
  circle w0.1: c80.1,74.6 r36
  circle w0.1: c100.1,94.6 r2
  circle w0.1: c60.1,94.6 r2
  circle w0.1: c60.1,54.6 r2
  circle w0.1: c100.1,54.6 r2